# Altium PCB PCB_Project_1.PcbDoc
Units mm, origin at the board's own origin, x right, y up, seen from the top; angles counter-clockwise.
Board outline 35.1 x 25.1 mm, 2 copper layers (TOP, BOT), stack 0.375 mm thick; 46 components, 39 nets, 159 pads, 27 vias.
Unrouted connection lines stored in the file: 320.
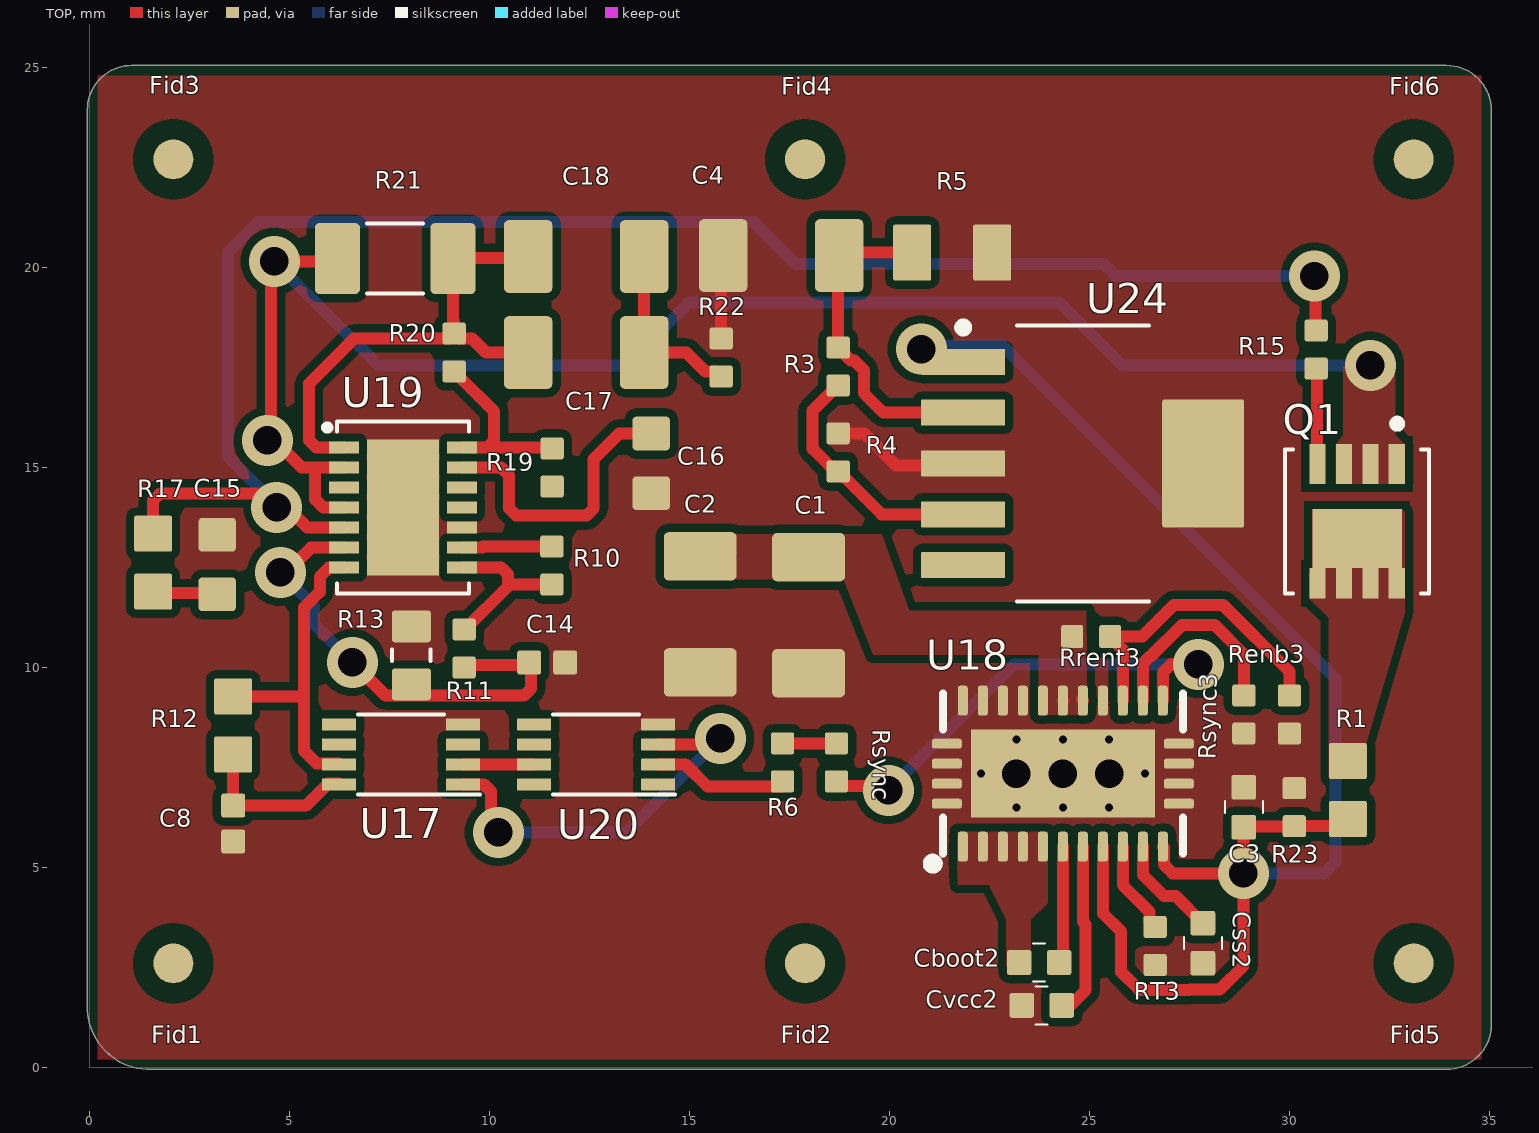
[diagram p0: TOP view]
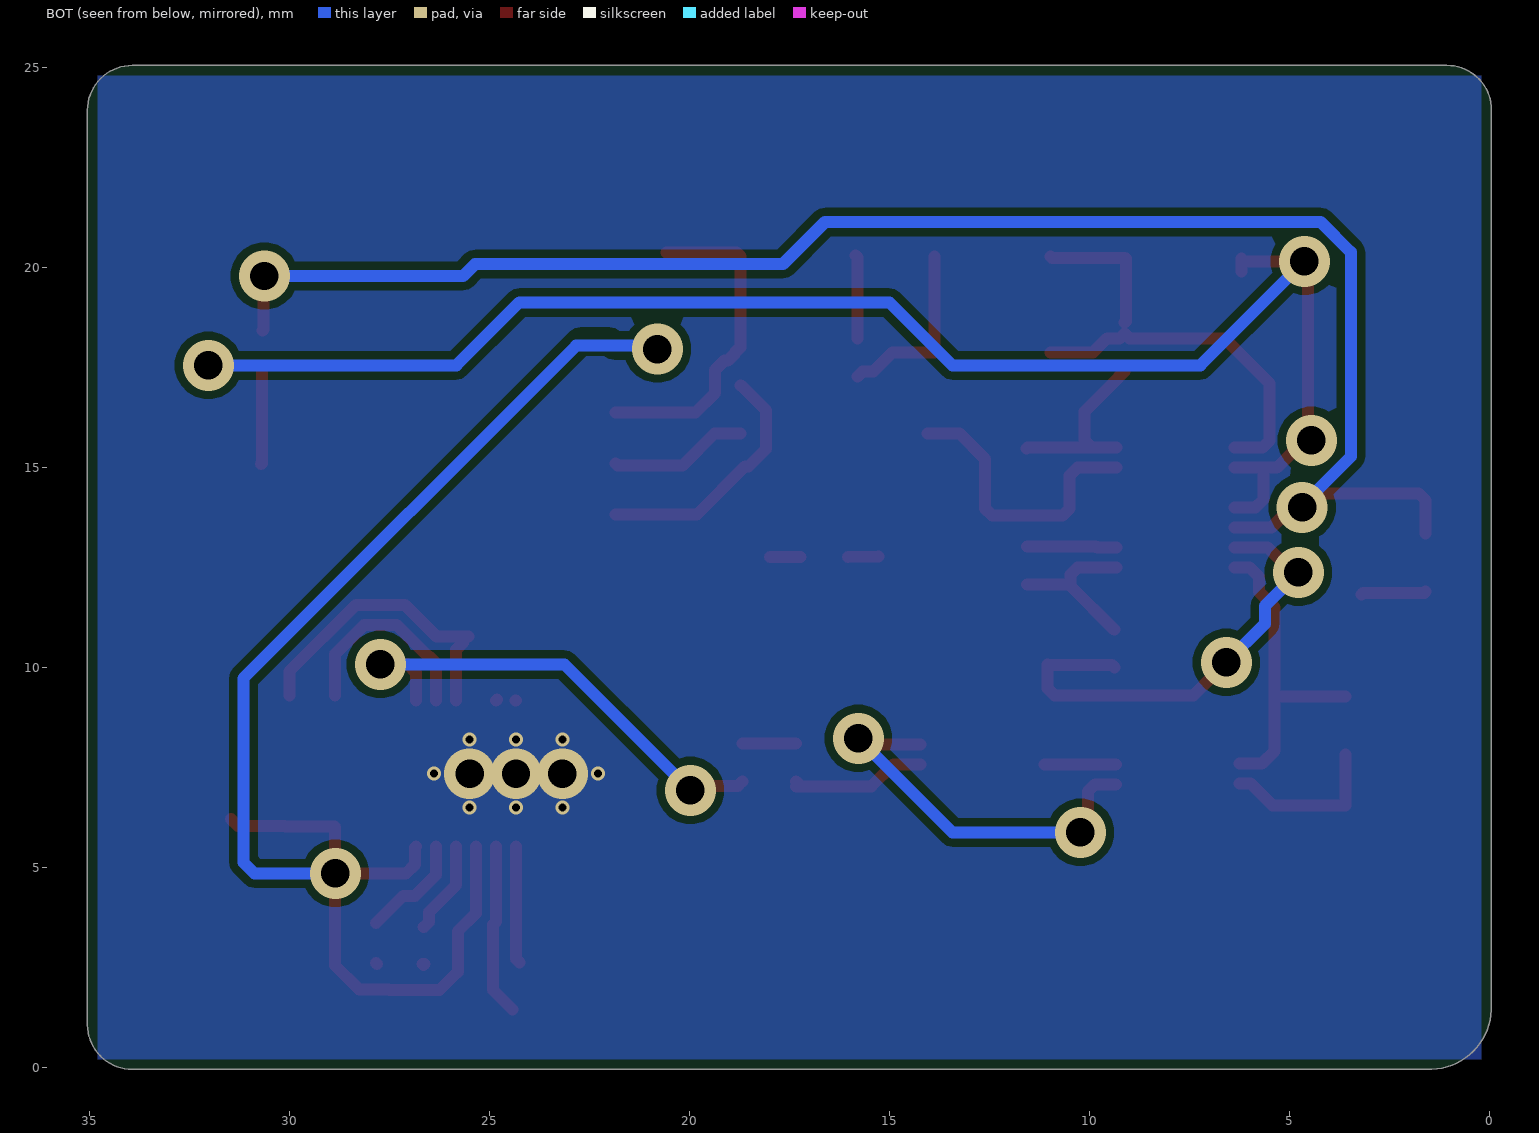
[diagram p1: BOT view, seen from below]
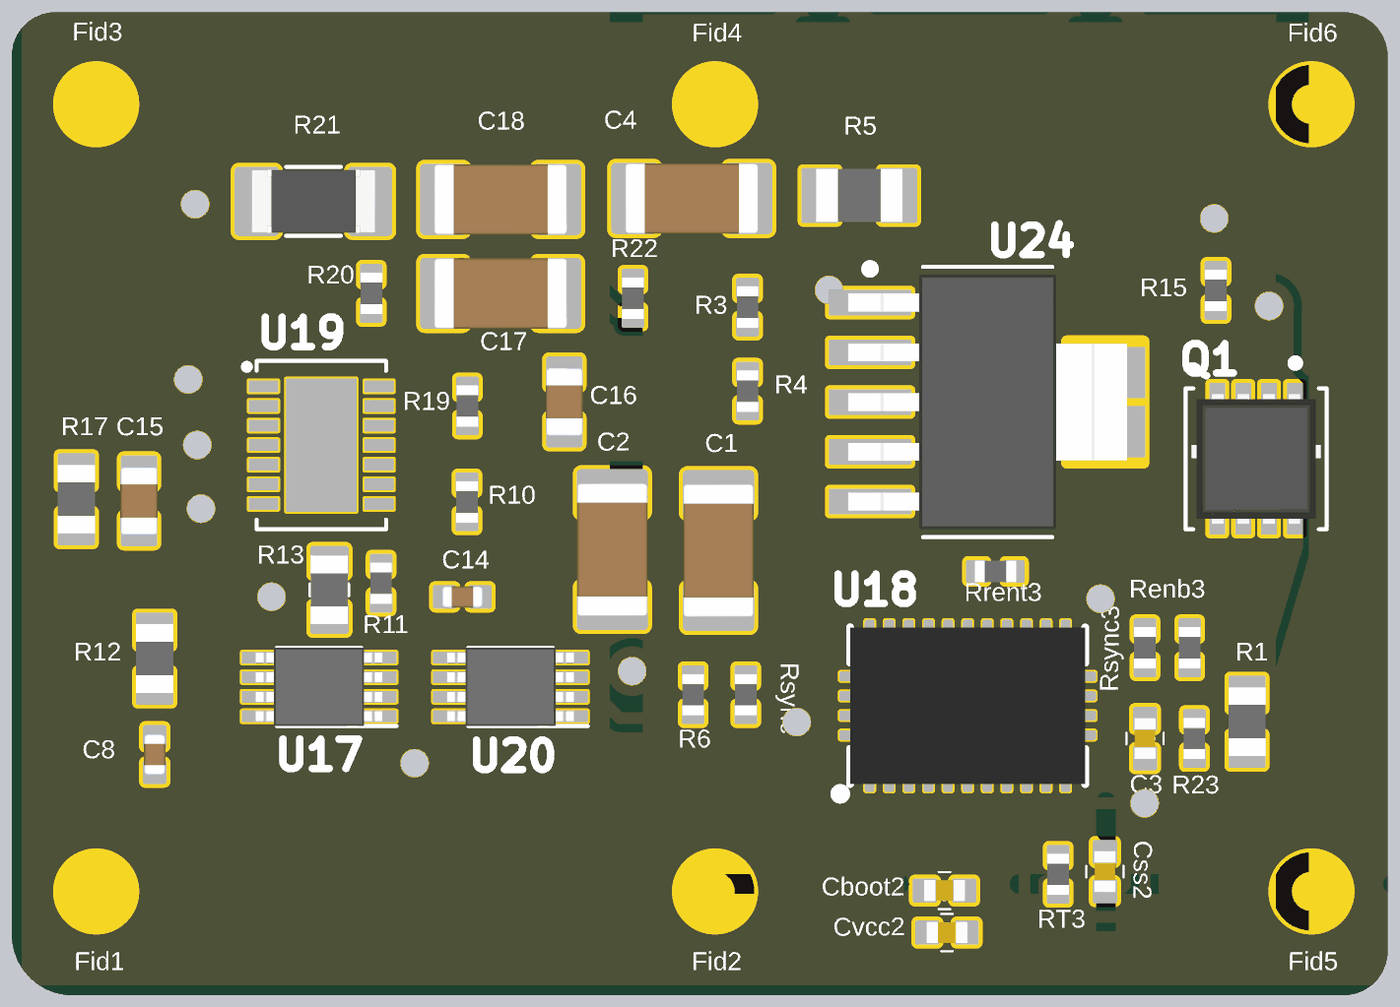
[diagram p2: 3D render of the assembled board from above, using the file's embedded part models]

## Layer stack, top to bottom
Top Solder: solder mask 0.01, Solder Resist, Dk 3.5
TOP: signal copper 0.035
Dielectric 1: core 0.3048, RO4003C, Dk 3.55
BOT: signal copper 0.035
Bottom Solder: solder mask 0.01, Solder Resist, Dk 3.5

## Board outline
-0.05,1.449 -0.05,23.939 cw(c1.061,23.939) 1.061,25.05 33.925,25.05 cw(c33.925,23.925) 35.05,23.928 35.05,23.927 35.05,1.075 35.05,1.069 cw(c33.925,1.075) 33.925,-0.05 1.449,-0.05 1.438,-0.049 cw(c1.5,1.5)

## Design rules (kind name [scope] priority, off if disabled: settings)
BoardOutlineClearance BoardOutlineClearance_TopSolder [IsPoly and OnTopSolderMask] p1: gap=0 ignorepadtopadclearanceinfootprint=FALSE
BoardOutlineClearance BoardOutlineClearance_botSolder [IsPoly and OnBottomSolderMask] p2: gap=0 ignorepadtopadclearanceinfootprint=FALSE
BoardOutlineClearance [All] p3: gap=0.2 ignorepadtopadclearanceinfootprint=FALSE
Clearance CTRL_UNIT_Clearance [WithinRoom('CTRL_UNIT_FANOUT')] p1: gap=0.1 ignorepadtopadclearanceinfootprint=FALSE
Clearance [All] p2: gap=0.2 ignorepadtopadclearanceinfootprint=TRUE
DiffPairsRouting [All] p1: maxlimit=0.3 minlimit=0.3 mostfreqgap=0.3 toplayer_minwidth=0.3 toplayer_maxwidth=0.3 toplayer_prefwidth=0.3 bottomlayer_minwidth=0.3 bottomlayer_maxwidth=0.3 bottomlayer_prefwidth=0.3 maxuncoupledlength=12.7
FabricationTestPointUsage TestPointUsage [All] p1: valid=0 allowmultiple=FALSE
FabricationTestpoint Testpoint [All] p1: side=3 testpointundercomponent=TRUE minsize=1.016 maxsize=2.54 preferedsize=1.524 minholesize=0 maxholesize=1.016 preferedholesize=0.813 testpointgrid=0.025 allowsidetop=TRUE allowsidebottom=TRUE usegrid=TRUE gridtolerance=0
HoleSize [All] p1: absolutevalues=TRUE maxlimit=5 minlimit=0.025 maxpercent=80.000 minpercent=20.000
HoleToHoleClearance [All] p1: gap=0.25 allowstackedmicrovias=TRUE
MinimumSolderMaskSliver [All] p1: minsoldermaskwidth=0.099
PlaneClearance [All] p1: clearance=0.2
PlaneConnect [All] p1: planeconnectstyle=Direct reliefexpansion=0.508 reliefentries=4 reliefconductorwidth=0.254 reliefairgap=0.254
PolygonConnect [All] p1: connectstyle=Direct reliefconductorwidth=0.254 reliefentries=4 polygonreliefangle="90 Angle" airgapwidth=0.254
RoutingCorners [All] p1: cornerstyle=45-Degree minsetback=1 maxsetback=1
RoutingVias [All] p1: holewidth=0.711 width=1.27 viastyle="Through Hole" minholewidth=0.711 minwidth=1.27 maxholewidth=0.711 maxwidth=1.27 useviatemplates=TRUE viatemplateguid#1={72B07870-E6F0-41A1-9A7A-AF21D1EB57B0} viatemplateguid#2={D1B59875-0DF5-4F30-926D-87D92F6A5A35} viatemplateguid#3={124C3F2C-4E11-4AFE-9AE5-E8E4755D781B} viatemplatename#1=v500h200T viatemplatename#2=v600h300T viatemplatename#3=v50h20m0mx0(Tol10-0)
SilkToSilkClearance [All] p1: silktosilkclearance=0.2
SilkToSolderMaskClearance SilkscreenOverComponentPads [IsPad] p1: minsilkscreentomaskgap=0.05 clearancetoexposedcopper=TRUE
SolderMaskExpansion [All] p1: expansion=0.102 istentingtop=FALSE
SupplyNets "Schematic Supply Nets" [InNet('GND')] p1: voltage=0.000
Width [All] p1: maxlimit=2 minlimit=0.2 preferedwidth=0.3
19 further rules are at their usual default settings.

## Classes and differential pairs
component class SE12: C3 C4 R2 R3 R4 R5 U24
component class SE10: C6 C8 C14 C15 C16 C17 C18 Q1 R6 R7 R8 R9 R10 R11 R12 R13 R14 R15 R16 R17 R18 R19 R20 R21 R22 R24 R142 U17 U19 U20
component class SE05: C1 C2 Cboot2 Css2 Cvcc2 L1 R23 Renb3 Rrent3 Rsync Rsync3 RT3 U18
component class "[01] - PCU_MODULE": R1
component class "[00] - INTERFACES_BOARD": Fid1 Fid2 Fid3 Fid4 Fid6

## Components (designator, comment, footprint, x,y, rotation, side; value= is the part's Value field where it differs from the comment)
C1 "22uF" CAPC320X160X180L55N 17.979,11.306 r90 top
C2 "22uF" CAPC320X160X180L55N 15.27,11.327 r90 top
C3 "" CAPC100X55X55L35N 28.86,6.504 r270 top
C4 "10uF" CAPC320X160X180L55N 17.295,20.297 r0 top
C8 "100nF" CAPC100X50X55L25N 3.595,6.097 r90 top
C14 "100nF" CAPC100X50X55L25N 11.445,10.122 r180 top
C15 "22nF" CAPC160X80X90L35N 3.195,12.572 r90 top
C16 "82nF" CAPC160X80X90L35N 14.045,15.102 r90 top
C17 "10uF" CAPC320X160X180L55N 12.42,17.872 r180 top
C18 "10uF" CAPC320X160X180L55N 12.42,20.272 r180 top
Cboot2 "4.7nF" CAPC100X55X55L35N 23.745,2.622 r180 top
Css2 "22nF" CAPC100X55X55L35N 27.837,3.106 r270 top
Cvcc2 "2.2uF" CAPC100X55X55L35N 23.808,1.55 r180 top
Fid1 "Fiducial_V2" Fiducial 2.1,2.6 r90 top
Fid2 "Fiducial_V2" Fiducial 17.891,2.6 r90 top
Fid3 "Fiducial_V2" Fiducial 2.1,22.702 r90 top
Fid4 "Fiducial_V2" Fiducial 17.891,22.702 r90 top
Fid5 "Fiducial_V2" Fiducial 33.107,2.6 r90 top
Fid6 "Fiducial_V2" Fiducial 33.107,22.702 r90 top
Q1 "SI7414DN-T1-GE3" "Vishay PowerPAK 1212-8 package" 31.695,13.647 r270 top
R1 "NoBom" RESC1608X50N 31.462,6.936 r90 top
R3 "12.7 k" RESC100X50X40L25N 18.72,17.522 r270 top
R4 "4.02 k" RESC100X50X40L25N 18.72,15.375 r270 top
R5 "NoBom" RESC2012X60N 21.57,20.372 r180 top
R6 "4.02 k" RESC100X50X40L25N 17.331,7.625 r90 top
R10 "54.9 k" RESC100X50X40L25N 11.561,12.547 r270 top
R11 "39K" RESC100X50X40L25N 9.37,10.472 r270 top
R12 "NoBom" RESC1608X50N 3.595,8.547 r270 top
R13 "NoBom" "RESC155X85X55L30N - NO BOM" 8.05,10.3 r270 top
R15 "10" RESC100X50X40L25N 30.67,17.947 r270 top
R17 "NoBom" RESC1608X50N 1.595,12.617 r270 top
R19 "4.99 k" RESC100X50X40L25N 11.57,14.997 r90 top
R20 "21K" RESC100X50X40L25N 9.12,17.872 r90 top
R21 "0R043" RESC315X160X65L50N 7.645,20.222 r0 top
R22 "0R1" RESC100X50X40L25N 15.795,17.747 r270 top
R23 "20K" RESC100X50X40L25N 30.12,6.504 r270 top
Renb3 "0" RESC100X50X40L25N 30,8.822 r90 top
Rrent3 "100K" RESC100X50X40L25N 25.045,10.772 r180 top
Rsync "100K" RESC100X50X40L25N 18.675,7.625 r270 top
Rsync3 "0" RESC100X50X40L25N 28.86,8.822 r90 top
RT3 "78.7 k" RESC100X50X40L25N 26.645,3.037 r270 top
U17 "SN74LVC2G08QDCURQ1" SOP50P310X90-8N 7.79,7.822 r90 top
U18 "TPS7H4010MRNPTSEP" TPS7H4010MRNPTSEP 24.335,7.342 r90 top
U19 "LTC4364HDE-2#PBF" DFN15P50_300X400X80L40X30T175X335 7.845,13.997 r0 top
U20 "SN74LVC2G08QDCURQ1" SOP50P310X90-8N 12.67,7.822 r90 top
U24 "TPS73801MDCQPSEP" SOT127P706X180-6N 24.845,15.097 r0 top

## Footprints (in the part's own frame and the unit in brackets; to place one, negate y for a bottom-side part, rotate by r counter-clockwise, add the part's x,y. Pads: shape width x height; smd on the part's side, far side on the other; paste and mask are expansions set on the pad)
CAPC100X50X55L25N [mm] "Capacitor, Chip;0402 (metric 1005); 1.00 mm L X 0.50 mm W X 0.55 mm H body"
  rrect20% 0.6x0.6 smd mask+0.1: 1(-0.45,0) 2(0.45,0)
  body extent -0.52,-0.27 0.53,0.28, height 0.55
CAPC100X55X55L35N [mm] "Capacitor, Chip;0402 (metric 1005); 1.05 mm L X 0.55 mm W X 0.55 mm H body"
  rrect20% 0.62x0.62 smd mask+0.1: 1(-0.5,0) 2(0.5,0)
  silkscreen extent -0.15,-0.48 0.15,0.48, body extent -0.53,-0.27 0.53,0.28, height 0.55
CAPC160X80X90L35N [mm] "Capacitor, Chip;0603 (metric 1608); 1.60 mm L X 0.80 mm W X 0.90 mm H body"
  rrect20% 0.84x0.93 smd: 1(-0.745,0) 2(0.745,0)
  body extent -0.87,-0.47 0.88,0.48, height 0.85
CAPC320X160X180L55N [mm] "Capacitor, Chip; 1206 (metric 3216);  3.20 mm L X 1.60 mm W X 1.80 mm H body"
  rrect20% 1.21x1.82 smd: 1(-1.45,0) 2(1.45,0)
  body extent -1.7,-0.9 1.7,0.9, height 1.8
DFN15P50_300X400X80L40X30T175X335 [mm] "DFN, 14 Leads, Pitch=0.50mm, Body=3.00x4.00mm, Height=0.80mm, Thermal Pad=1.75x3.35mm"
  rrect1% 0.75x0.3 smd mask+0.05: 1(-1.475,1.5) 2(-1.475,1) 3(-1.475,0.5) 4(-1.475,0) 5(-1.475,-0.5) 6(-1.475,-1) 7(-1.475,-1.5) 8(1.475,-1.5) 9(1.475,-1) 10(1.475,-0.5) 11(1.475,0) 12(1.475,0.5) 13(1.475,1) 14(1.475,1.5)
  rrect1% 1.8x3.4 smd mask+0.05: 15(0,0)
  silkscreen extent -1.92,-2.15 1.65,2.15, body extent -1.5,-2 1.5,2, height 0.75
Fiducial [mm] "Fiducial"
  round 1 smd paste-1 mask+0.6: 1(0,0)
  TOP pour cut-out: 0,-1 -0.383,-0.924 -0.707,-0.707 -0.924,-0.383 -1,0 -1,0 -0.924,0.383 -0.707,0.707 -0.383,0.924 0,1 0,1 0.383,0.924 0.707,0.707 0.924,0.383 1,0 1,0 0.924,-0.383 0.707,-0.707 0.383,-0.924 0,-1
RESC100X50X40L25N [mm] "Resistor, Chip; 0402 (metric 1005); 1.00 mm L X 0.50 mm W X 0.40 mm H body"
  rrect20% 0.55x0.58 smd: 1(-0.475,0) 2(0.475,0)
  body extent -0.52,-0.27 0.53,0.28, height 0.4
"RESC155X85X55L30N - NO BOM" [mm] "Resistor, Chip; 0603 (metric 1608);  1.55 mm L X 0.85 mm W X 0.55 mm H body"
  rrect20% 0.8x0.98 smd: 1(-0.725,0) 2(0.725,0)
  silkscreen extent -0.15,-0.48 0.15,0.48, body extent -0.87,-0.47 0.88,0.48, height 0.55
RESC315X160X65L50N [mm] "Resistor, Chip; 1206 (metric 3216); 3.15 mm L X 1.60 mm W X 0.65 mm H body"
  rrect20% 1.13x1.77 smd: 1(-1.445,0) 2(1.445,0)
  silkscreen extent -0.7,-0.88 0.7,0.88, body extent -1.58,-0.8 1.58,0.8, height 0.65
RESC1608X50N [mm] "Chip Resistor, EIA 0603, Body=1.60x0.80mm, Height=0.50mm, IPC Medium Density"
  rrect10% 0.9x0.95 smd mask+0.1: 1(-0.725,0) 2(0.725,0)
  body extent -0.87,-0.47 0.88,0.48, height 0.5
RESC2012X60N [mm] "Chip Resistor, EIA 0805, Body=2.00x1.25mm, Height=0.60mm, IPC Medium Density"
  rrect10% 0.95x1.4 smd mask+0.1: 1(-1,0) 2(1,0)
  body extent -1.1,-0.67 1.1,0.68, height 0.6
SOP50P310X90-8N [mm] "SOP,VSSOP8,SOT765-1, 0.50mm pitch; 8 pin, 2.30mm W X 2.00mm L X 0.90mm H body, PC Medium Density"
  rrect10% 0.3x0.85 smd mask+0.05: 1(-0.75,-1.55) 2(-0.25,-1.55) 3(0.25,-1.55) 4(0.75,-1.55) 5(0.75,1.55) 6(0.25,1.55) 7(-0.25,1.55) 8(-0.75,1.55)
  silkscreen extent -1,-1.97 1,1.07, body extent -1,-1.62 1,1.62, height 0.9
SOT127P706X180-6N [mm]
  rrect5% 2.1x0.65 smd: 1(-3,2.54) 2(-3,1.27) 3(-3,0) 4(-3,-1.27) 5(-3,-2.54)
  rrect5% 2.05x3.2 smd paste-2: 6(3,0)
  silkscreen extent -3.1,-3.45 1.65,3.5, body extent -3.55,-3.25 3.55,3.25, height 1.66
TPS7H4010MRNPTSEP [mm]
  rrect50% 0.75x0.25 smd mask-2539.97: 1(-1.825,2.5) 2(-1.825,2) 3(-1.825,1.5) 4(-1.825,1) 5(-1.825,0.5) 6(-1.825,0) 7(-1.825,-0.5) 8(-1.825,-1) 9(-1.825,-1.5) 10(-1.825,-2) 11(-1.825,-2.5) 16(1.825,-2.5) 17(1.825,-2) 18(1.825,-1.5) 19(1.825,-1) 20(1.825,-0.5) 21(1.825,0) 22(1.825,0.5) 23(1.825,1) 24(1.825,1.5) 25(1.825,2) 26(1.825,2.5)
  rrect50% 0.25x0.75 smd mask-2539.97: 12(-0.75,-2.9) 13(-0.25,-2.9) 14(0.25,-2.9) 15(0.75,-2.9) 27(0.75,2.9) 28(0.25,2.9) 29(-0.25,2.9) 30(-0.75,2.9)
  rect 2.2x4.6 smd paste-2539.97: 31(0,0)
  rrect50% 0.98x0.96 on Top Paste: ""(-0.58,1.74) ""(-0.58,-0.58) ""(-0.58,0.58) ""(-0.58,-1.74) ""(0.58,1.74) ""(0.58,-0.58) ""(0.58,0.58) ""(0.58,-1.74)
  silkscreen extent -2.37,-3 2,3.37, body extent -2,-3 2,3, height 0.8
"Vishay PowerPAK 1212-8 package" [mm]
  rect 0.99x0.405 smd: 1(-1.438,0.99) 2(-1.438,0.33) 3(-1.438,-0.33) 4(-1.438,-0.99)
  rect 0.76x0.405 smd: 5(1.547,-0.99) 6(1.547,-0.33) 7(1.547,0.33) 8(1.547,0.99)
  rect 1.475x2.235 smd: 9(0.43,0)
  silkscreen extent -2.54,-1.8 1.8,1.8, body extent -1.65,-1.65 1.65,1.65, height 1.06

## Part data
C1 C2: library part GRM31CC71E226ME15L, "CAP CER 22uF 25V ±20% X7S 1206", Case/Package=340Case, Dielectric=1542DielectricType, Manufacturer=Murata, Max Operating Temperature=125°C, Min Operating Temperature=-55°C, Supplier Part Number=490-GRM31CC71E226ME15LCT-ND, Tolerance=20%, Voltage Rating=25V, Capacitance=22uF, Category="Ceramic Capacitors", ComponentLink1Description=Datasheet, ComponentLink1URL=https://search.murata.co.jp/Ceramy/image/img/A01X/G101/ENG/GRM31CC71E226ME15-01A.pdf, Height=1.9mm, Length=3.2mm, Manufacturer Part Number=GRM31CC71E226ME15L, Material=4241ConductorMaterial, Pricing 1="1=0,92, 10=0,562, 50=0,4202, 100=0,3759, 500=0,30056, 1000=0,27702 (USD)", RoHS=No, Stock 1=3447, Supplier=Digikey, Thickness=1.6mm, Voltage Rating (DC)=25V, Width=1.6mm
C3 Css2: library part GRM155R71E223JA61, "Multilayer Ceramic Capacitor, 0.022 uF, 25 V, ± 5%, X7R, 0402 [1005 Metric]", Manufacturer=Murata, Manufacturer Part Number=GRM155R71E223JA61D, Supplier Part Number=3582812, Category="Ceramic Capacitors", ComponentLink1Description=https://datasheet.ciiva.com/5427/product-5427580.pdf?src-supplier=Mouser, ComponentLink1URL=https://datasheet.ciiva.com/5427/product-5427580.pdf?src-supplier=Mouser, ComponentLink2Description=https://datasheet.ciiva.com/29535/grm155r71e223ka61-01-29535418.pdf?src-supplier=Digikey, ComponentLink2URL=https://datasheet.ciiva.com/29535/grm155r71e223ka61-01-29535418.pdf?src-supplier=Digikey, Material=4241ConductorMaterial, Pricing="10=0,017, 100=0,013, 500=0,012, 2500=0,0118, 5000=0,0115 (EUR)", RoHS=Yes, Stock=11149, Supplier=Farnell
C4 C17 C18: library part C3216X7R1H106K160AC, "CAP CER 10UF 50V X7R 1206", Case Code (Imperial)=1206, Case Code (Metric)=3216, Dielectric=1511DielectricType, Manufacturer=TDK, Max Operating Temperature=125°C, Min Operating Temperature=-55°C, Supplier Part Number 1=71AH3370, Tolerance=10%, Voltage Rating=50V, Capacitance=10uF, Case/Package=1206, Category="Ceramic Capacitors", ComponentLink1Description=https://product.tdk.com/info/en/catalog/datasheets/mlcc_commercial_general_en.pdf?src-supplier=Digikey, ComponentLink1URL=https://product.tdk.com/info/en/catalog/datasheets/mlcc_commercial_general_en.pdf?src-supplier=Digikey, ComponentLink2Description=https://datasheet.octopart.com/C3216X7R1H106K160AC-TDK-datasheet-159617022.pdf?src-supplier=TME, ComponentLink2URL=https://datasheet.octopart.com/C3216X7R1H106K160AC-TDK-datasheet-159617022.pdf?src-supplier=TME, Height=1.9mm, Lead Free=5697LeadFree, Length=3.2mm, Manufacturer Part Number=C3216X7R1H106K160AC, Material=4241ConductorMaterial, Mount="Surface Mount", Packaging="Cut Tape", Pricing 1="1=0,797, 10=0,603, 25=0,57, 50=0,537, 100=0,505 (USD)", RoHS=Yes, RoHS Compliant=Yes, Series=C, Stock 1=19909, Supplier 1=Avnet, Thickness=1.6mm, Voltage Rating (DC)=50V, Width=1.6mm
C8 C14: library part C1005X7R1H104K050BB, "CAP CER 100nF 50V ±10% X7R 0402", Case Code (Imperial)=0402, Case Code (Metric)=1005, Dielectric=X7R, Dielectric Material=Ceramic, Manufacturer=TDK, Max Operating Temperature=125°C, Min Operating Temperature=-55°C, Package Quantity=1, Supplier Part Number 1=2427315, Tolerance=10%, Voltage=50V, Capacitance=100nF, Case/Package=0402, Category="Ceramic Capacitors", ComponentLink1Description=https://datasheet.ciiva.com/16427/c1005x7r1h104k050bb-16427685.pdf?src-supplier=Future+Electronics, ComponentLink1URL=https://datasheet.ciiva.com/16427/c1005x7r1h104k050bb-16427685.pdf?src-supplier=Future+Electronics, ComponentLink2Description=https://datasheet.ciiva.com/26285/2983c1005x7r1h104k050bb-26285417.pdf?src-supplier=Onlinecomponents.com, ComponentLink2URL=https://datasheet.ciiva.com/26285/2983c1005x7r1h104k050bb-26285417.pdf?src-supplier=Onlinecomponents.com, ComponentLink3Description=https://datasheet.ciiva.com/22725/1913358-22725480.pdf?src-supplier=Element14, ComponentLink3URL=https://datasheet.ciiva.com/22725/1913358-22725480.pdf?src-supplier=Element14, ComponentLink4Description=https://datasheet.ciiva.com/6292/tdkmlcccaprange-6292410.pdf?src-supplier=Digi-Key, ComponentLink4URL=https://datasheet.ciiva.com/6292/tdkmlcccaprange-6292410.pdf?src-supplier=Digi-Key, ComponentLink5Description=https://datasheet.ciiva.com/22725/1913358-22725482.pdf?src-supplier=Element14, ComponentLink5URL=https://datasheet.ciiva.com/22725/1913358-22725482.pdf?src-supplier=Element14, ComponentLink6Description=https://datasheet.ciiva.com/23802/1796654-23802749.pdf?src-supplier=Newark, ComponentLink6URL=https://datasheet.ciiva.com/23802/1796654-23802749.pdf?src-supplier=Newark, ComponentLink7Description=https://datasheet.ciiva.com/48671/e412-c-48671294.pdf?src-supplier=Avnet, ComponentLink7URL=https://datasheet.ciiva.com/48671/e412-c-48671294.pdf?src-supplier=Avnet, ComponentLink8Description=https://datasheet.ciiva.com/6292/tdkmlcccaprange-6292415.pdf?src-supplier=Digi-Key, ComponentLink8URL=https://datasheet.ciiva.com/6292/tdkmlcccaprange-6292415.pdf?src-supplier=Digi-Key, Construction=Flat, Depth=0.5mm, Height=0.5mm, Lead Free="Lead Free", Length=1mm, Manufacturer Part Number=C1005X7R1H104K050BB, Mount="Surface Mount", Packaging="Tape and Reel", Pricing 1="100=0,04100, 200=0,02500, 500=0,02100, 1000=0,01700 (EUR)", Radiation Hardening=No, Resistor Type=Ceramic, RoHS=Yes, RoHS Compliant=Yes, Series=C, Stock 1=9900, Supplier 1=Rs, Termination=SMD/SMT, Thickness=0.022inch, Voltage Rating=50V, Voltage Rating (DC)=50V, Weight=2.3E-05oz, Width=0.02inch
C15: library part 885012206091, "CAP CER 22nF 50V ±10% X7R 0603", Capacitor Type=Ceramic, Manufacturer 1="Wurth Electronics Inc.", Operating Temperature="-55°C ~ 125°C", Package / Case="0603 (1608 Metric)", Supplier Part Number 1=732-8009-1-ND, Temperature Coefficient=X7R, Tolerance=±10%, Voltage Rating=50V, Applications="General Purpose", Capacitance=22nF, Category=Capacitors, ComponentLink1Description="Online Datasheet", ComponentLink1URL=https://katalog.we-online.de/pbs/datasheet/885012206091.pdf, Description 1="CAP CER 22nF 50V ±10% X7R 0603", Features=-, Footprint Name=CAPC1608X85N, Manufacturer Part Number 1=885012206091, Mounting Type="Surface Mount", Packaging="Cut Tape (CT)", Part Status=Active, RoHS="RoHS Compliant", Supplier 1=Digi-Key
C16: library part KAM15AR71H823KT, "CAP CER 82nF 50V ±10% X7R 0603", Capacitor Type=Ceramic, Manufacturer="KYOCERA AVX", Operating Temperature="-55°C ~ 125°C", Package / Case="0603 (1608 Metric)", Supplier Part Number=478-KAM15AR71H823KTCT-ND, Temperature Coefficient=X7R, Tolerance=±10%, Voltage Rating=50V, Applications="General Purpose", Capacitance=82nF, Category=Capacitors, ComponentLink1Description=Datasheet, ComponentLink1URL=https://datasheets.kyocera-avx.com/AutoMLCCKAM.pdf, Features=-, Footprint Name=CAPC160X80X90L35N, Manufacturer Part Number=KAM15AR71H823KT, Mounting Type="Surface Mount", Packaging="Cut Tape (CT)", Part Status=Active, RoHS="RoHS Compliant", Supplier=Digi-Key
Cboot2: library part GRM155R71E472KA01, "0402 4.7 nF 25 V ±10% Tolerance X7R SMT Multilayer Ceramic Capacitor", Manufacturer=Murata, Manufacturer Part Number=GRM155R71E472KA01D, Supplier Part Number=4326802, Category="Ceramic Capacitors", ComponentLink1Description=https://datasheet.ciiva.com/18184/getdatasheetpartid-129543-18184709.pdf?src-supplier=Verical, ComponentLink1URL=https://datasheet.ciiva.com/18184/getdatasheetpartid-129543-18184709.pdf?src-supplier=Verical, ComponentLink2Description=https://datasheet.ciiva.com/130/product-130032.pdf?src-supplier=Digikey, ComponentLink2URL=https://datasheet.ciiva.com/130/product-130032.pdf?src-supplier=Digikey, ComponentLink3Description=https://datasheet.ciiva.com/16392/product-16392847.pdf?src-supplier=Future+Electronics, ComponentLink3URL=https://datasheet.ciiva.com/16392/product-16392847.pdf?src-supplier=Future+Electronics, ComponentLink4Description=https://datasheet.ciiva.com/2989/product-2989394.pdf?src-supplier=Avnet, ComponentLink4URL=https://datasheet.ciiva.com/2989/product-2989394.pdf?src-supplier=Avnet, ComponentLink5Description=https://datasheet.ciiva.com/2989/product-2989393.pdf?src-supplier=Avnet, ComponentLink5URL=https://datasheet.ciiva.com/2989/product-2989393.pdf?src-supplier=Avnet, ComponentLink6Description=https://datasheet.ciiva.com/130/partnumbering-e-01-130033.pdf?src-supplier=Digikey, ComponentLink6URL=https://datasheet.ciiva.com/130/partnumbering-e-01-130033.pdf?src-supplier=Digikey, ComponentLink7Description=https://datasheet.ciiva.com/130/partnumbering-e-01-130034.pdf?src-supplier=Digikey, ComponentLink7URL=https://datasheet.ciiva.com/130/partnumbering-e-01-130034.pdf?src-supplier=Digikey, Lead Free=5697LeadFree, Material=4241ConductorMaterial, Pins=2NUMBER, Pricing="10=0,015, 100=0,01, 500=0,007, 2500=0,006, 5000=0,0059 (EUR)", RoHS=Yes, Stock=39799, Supplier=Farnell
Cvcc2: library part GRM155D71C225ME11, "Multilayer Ceramic Capacitor, 2.2 uF, 16 V, ± 20%, X7T, 0402 [1005 Metric]", Case/Package=343Case, Dielectric=1545DielectricType, Manufacturer=Murata, Manufacturer Part Number=GRM155D71C225ME11D, Max Operating Temperature=125°C, Min Operating Temperature=-55°C, Supplier Part Number=81-GRM155D71C225ME11, Tolerance=20%, Voltage Rating=16V, Category="Ceramic Capacitors", ComponentLink1Description=https://datasheet.octopart.com/GRM155D71C225ME11D-Murata-datasheet-165579666.pdf?src-supplier=TME, ComponentLink1URL=https://datasheet.octopart.com/GRM155D71C225ME11D-Murata-datasheet-165579666.pdf?src-supplier=TME, Height=650um, Length=1mm, Material=4241ConductorMaterial, Pricing="1=0,17, 10=0,113, 50=0,113, 100=0,073, 1000=0,067, 10000=0,057 (USD)", RoHS=Yes, RoHS Compliant=Yes, Stock=102807, Supplier=Mouser, Thickness=500um, Voltage Rating (DC)=16V, Width=500um
Fid1 Fid2 Fid3 Fid4 Fid5 Fid6: "Fiducial No Pin", Category=Miscellaneous
Q1: "MOSFET N-CH 60V 5.6A PPAK1212-8", Manufacturer="Vishay Siliconix", Supplier Part Number=SI7414DN-T1-GE3CT-ND, Category=MOSFETs, ComponentLink1Description=Datasheet, ComponentLink1URL=https://www.vishay.com/docs/71738/71738.pdf, Manufacturer Part Number=SI7414DN-T1-GE3, Pricing 1="1=2,27, 10=1,455, 100=0,9898, 500=0,79058, 1000=0,72652 (USD)", RoHS=Yes, Stock 1=6579, Supplier=Digikey
R1 R12 R17: library part 1RES_NO_BOM, "Resistore Non in BOM", Category=Resistors
R3: library part CRCW040212K7FKED, "RES 12K7 OHM 1/16W 1% 0402", Manufacturer="Vishay Dale", Operating Temperature="-55 °C ~ 155 °C", Package / Case="0402 (1005 metrico)", Power (Watts)="0,063 W, 1/16 W", Resistance=12K7, Supplier Part Number 1=541-12.7KLCT-ND, Temperature Coefficient="±100 ppm/ °C", Tolerance=±1%, Category=Resistors, ComponentLink1Description=Datasheet, ComponentLink1URL=http://www.vishay.com/docs/20035/dcrcwe3.pdf, Composition="Thick Film", Features="AEC Q100 automotive", Footprint Name=RESC1005X40N, Manufacturer 1="Vishay Dale", Manufacturer Part Number=CRCW040212K7FKED, Manufacturer Part Number 1=CRCW040212K7FKED, Packaging="Cut Tape (CT)", Part Status=Active, Supplier 1=Digi-Key
R4 R6: library part CRCW04024K02FKED, "RES 4K02 OHM 1/16W 1% 0402", Manufacturer="Vishay Dale", Operating Temperature="-55 °C ~ 155 °C", Package / Case="0402 (1005 metrico)", Power (Watts)="0,063 W, 1/16 W", Resistance=4K02, Supplier Part Number 1=541-4.02KLCT-ND, Temperature Coefficient="±100 ppm/ °C", Tolerance=±1%, Category=Resistors, ComponentLink1Description=Datasheet, ComponentLink1URL=http://www.vishay.com/docs/20035/dcrcwe3.pdf, Composition="Thick Film", Features="AEC Q100 automotive", Footprint Name=RESC1005X40N, Manufacturer 1="Vishay Dale", Manufacturer Part Number=CRCW04024K02FKED, Manufacturer Part Number 1=CRCW04024K02FKED, Packaging="Cut Tape (CT)", Part Status=Active, Supplier 1=DigiKey
R5: library part 1RES_NO_BOM_0805, "Resistore Non in BOM", Category=Resistors
R10: library part CRCW040254K9FKED, "RES 54K9 OHM 1/16W 1% 0402", Manufacturer="Vishay Dale", Operating Temperature="-55 °C ~ 155 °C", Package / Case="0402 (1005 metrico)", Power (Watts)="0,063 W, 1/16 W", Resistance=54K9, Supplier Part Number 1=541-54.9KLCT-ND, Temperature Coefficient="±100 ppm/ °C", Tolerance=±1%, Category=Resistors, ComponentLink1Description=Datasheet, ComponentLink1URL=http://www.vishay.com/docs/20035/dcrcwe3.pdf, Composition="Thick Film", Features="AEC Q100 automotive", Footprint Name=RESC1005X40N, Manufacturer 1="Vishay Dale", Manufacturer Part Number=CRCW040254K9FKED, Manufacturer Part Number 1=CRCW040254K9FKED, Packaging="Cut Tape (CT)", Part Status=Active, Supplier 1=DigiKey
R11: library part CRCW040239K0FKED, "RES 39K OHM 1/16W 1% 0402", Manufacturer="Vishay Dale", Operating Temperature="-55 °C ~ 155 °C", Package / Case="0402 (1005 metrico)", Power (Watts)="0,063 W, 1/16 W", Supplier Part Number 1=541-39.0KLCT-ND, Temperature Coefficient="±100 ppm/ °C", Tolerance=±1%, Category=Resistors, ComponentLink1Description=Datasheet, ComponentLink1URL=http://www.vishay.com/docs/20035/dcrcwe3.pdf, Composition="Thick Film", Features="AEC Q100 automotive", Footprint Name=RESC1005X40N, Manufacturer 1="Vishay Dale", Manufacturer Part Number=CRCW040239K0FKED, Manufacturer Part Number 1=CRCW040239K0FKED, Packaging="Cut Tape (CT)", Part Status=Active, Resistance=39K, Supplier 1=DigiKey
R13: library part 1RES_NO_BOM_0603, "Resistore Non in BOM", Category=Resistors
R15: library part CRCW040210R0FKED, "RES 10 OHM 1/16W 1% 0402", Manufacturer="Vishay Dale", Operating Temperature="-55 °C ~ 155 °C", Package / Case="0402 (1005 metrico)", Power (Watts)="0,063 W, 1/16 W", Supplier Part Number 1=541-10.0LCT-ND, Temperature Coefficient="±100 ppm/ °C", Tolerance=±1%, Category=Resistors, ComponentLink1Description=Datasheet, ComponentLink1URL=http://www.vishay.com/docs/20035/dcrcwe3.pdf, Composition="Thick Film", Features="AEC Q100 automotive", Footprint Name=RESC1005X40N, Manufacturer 1="Vishay Dale", Manufacturer Part Number=CRCW040210R0FKED, Manufacturer Part Number 1=CRCW040210R0FKED, Packaging="Cut Tape (CT)", Part Status=Active, Resistance=10, Supplier 1=Digi-Key
R19: library part CRCW04024K99FKED, "RES 4K99 OHM 1/16W 1% 0402", Manufacturer="Vishay Dale", Operating Temperature="-55 °C ~ 155 °C", Package / Case="0402 (1005 metrico)", Power (Watts)="0,063 W, 1/16 W", Resistance=4K99, Supplier Part Number 1=541-4.99KLCT-ND, Temperature Coefficient="±100 ppm/ °C", Tolerance=±1%, Category=Resistors, ComponentLink1Description=Datasheet, ComponentLink1URL=http://www.vishay.com/docs/20035/dcrcwe3.pdf, Composition="Thick Film", Features="AEC Q100 automotive", Footprint Name=RESC1005X40N, Manufacturer 1="Vishay Dale", Manufacturer Part Number=CRCW04024K99FKED, Manufacturer Part Number 1=CRCW04024K99FKED, Packaging="Cut Tape (CT)", Part Status=Active, Supplier 1=DigiKey
R20: library part CRCW040221K0FKED, "RES 21K OHM 1/16W 1% 0402", Manufacturer="Vishay Dale", Operating Temperature="-55 °C ~ 155 °C", Package / Case="0402 (1005 metrico)", Power (Watts)="0,063 W, 1/16 W", Supplier Part Number 1=541-21.0KLCT-ND, Temperature Coefficient="±100 ppm/ °C", Tolerance=±1%, Category=Resistors, ComponentLink1Description=Datasheet, ComponentLink1URL=http://www.vishay.com/docs/20035/dcrcwe3.pdf, Composition="Thick Film", Features="AEC Q100 automotive", Footprint Name=RESC1005X40N, Manufacturer 1="Vishay Dale", Manufacturer Part Number=CRCW040221K0FKED, Manufacturer Part Number 1=CRCW040221K0FKED, Packaging="Cut Tape (CT)", Part Status=Active, Resistance=21K, Supplier 1=Digi-Key
R21: library part WSTM1206QLR043FNR, "RES 0R043 OHM 1W 1% 1206", Manufacturer=Littelfuse, Supplier Part Number=18-WSTM1206QLR043FNRCT-ND, Category="Chip SMD Resistors", ComponentLink1Description=Datasheet, ComponentLink1URL=https://mm.digikey.com/Volume0/opasdata/d220001/medias/docus/4897/WSTM_Series_3-17-23.pdf, Manufacturer Part Number=WSTM1206QLR043FNR, Pricing 1="1=0,61, 10=0,41, 25=0,34, 50=0,2876, 100=0,2153, 250=0,19176, 500=0,1569, 1000=0,12203, 5000=0,10788 (USD)", Resistance=0R043, RoHS=No, Stock 1=4775, Supplier=Digikey
R22: library part RUT1005FR100CS, "RES 0R1 OHM 1/10W 1% 0402", Manufacturer="Samsung Electro-Mechanics America, Inc.", Operating Temperature="-55°C ~ 155°C", Package / Case="0402 (1005 Metric)", Power (Watts)="0.1W, 1/10W", Supplier Part Number 1=1276-6167-1-ND, Temperature Coefficient=±150ppm/°C, Tolerance=±1%, Category=Resistors, ComponentLink1Description=http://www.samsungsem.com/kr/support/library/product-catalog/__icsFiles/afieldfile/2015/09/22/CHIP_RESISTOR_2015.pdf, ComponentLink1URL=http://www.samsungsem.com/kr/support/library/product-catalog/__icsFiles/afieldfile/2015/09/22/CHIP_RESISTOR_2015.pdf, Composition="Thick Film", Features="Current Sense, Moisture Resistant", Footprint Name=RESC1005X40N, Manufacturer 1="Samsung Electro-Mechanics America, Inc.", Manufacturer Part Number=RUT1005FR100CS, Manufacturer Part Number 1=RUT1005FR100CS, Packaging="Cut Tape (CT)", Part Status=Active, Resistance=0R1, Supplier 1=Digi-Key
R23: library part CRCW040220K0FKED, "RES 20K OHM 1/16W 1% 0402", Manufacturer="Vishay Dale", Operating Temperature="-55 °C ~ 155 °C", Package / Case="0402 (1005 metrico)", Power (Watts)="0,063 W, 1/16 W", Supplier Part Number 1=541-20.0KLCT-ND, Temperature Coefficient="±100 ppm/ °C", Tolerance=±1%, Category=Resistors, ComponentLink1Description=Datasheet, ComponentLink1URL=http://www.vishay.com/docs/20035/dcrcwe3.pdf, Composition="Thick Film", Features="AEC Q100 automotive", Footprint Name=RESC1005X40N, Manufacturer 1="Vishay Dale", Manufacturer Part Number=CRCW040220K0FKED, Manufacturer Part Number 1=CRCW040220K0FKED, Packaging="Cut Tape (CT)", Part Status=Active, Resistance=20K, Supplier 1=Digi-Key
Renb3 Rsync3: library part CRCW0402100KFKED, "RES  100K OHM 1/16W 1% 0402", Manufacturer="Vishay Dale", Operating Temperature="-55 °C ~ 155 °C", Package / Case="0402 (1005 metrico)", Power (Watts)="0,063 W, 1/16 W", Resistance=100K, Supplier Part Number 1=541-100KLCT-ND, Temperature Coefficient="±100 ppm/ °C", Tolerance=±1%, Category=Resistors, ComponentLink1Description=Datasheet, ComponentLink1URL=http://www.vishay.com/docs/20035/dcrcwe3.pdf, Composition="Thick Film", Features="AEC Q100 automotive", Footprint Name=RESC1005X40N, Manufacturer 1="Vishay Dale", Manufacturer Part Number=CRCW0402100KFKED, Manufacturer Part Number 1=CRCW0402100KFKED, Packaging="Cut Tape (CT)", Part Status=Active, Supplier 1=Digi-Key
Rrent3: library part CRCW0402100KFKED, "RES 100K OHM 1/16W 1% 0402", Manufacturer="Vishay Dale", Operating Temperature="-55 °C ~ 155 °C", Package / Case="0402 (1005 metrico)", Power (Watts)="0,063 W, 1/16 W", Supplier Part Number 1=541-100KLCT-ND, Temperature Coefficient="±100 ppm/ °C", Tolerance=±1%, Category=Resistors, ComponentLink1Description=Datasheet, ComponentLink1URL=http://www.vishay.com/docs/20035/dcrcwe3.pdf, Composition="Thick Film", Features="AEC Q100 automotive", Footprint Name=RESC1005X40N, Manufacturer 1="Vishay Dale", Manufacturer Part Number=CRCW0402100KFKED, Manufacturer Part Number 1=CRCW0402100KFKED, Packaging="Cut Tape (CT)", Part Status=Active, Resistance=100K, Supplier 1=Digi-Key
Rsync: library part CRCW0402100KFKED, "RES  100K OHM 1/16W 1% 0402", Manufacturer="Vishay Dale", Operating Temperature="-55 °C ~ 155 °C", Package / Case="0402 (1005 metrico)", Power (Watts)="0,063 W, 1/16 W", Supplier Part Number 1=541-100KLCT-ND, Temperature Coefficient="±100 ppm/ °C", Tolerance=±1%, Category=Resistors, ComponentLink1Description=Datasheet, ComponentLink1URL=http://www.vishay.com/docs/20035/dcrcwe3.pdf, Composition="Thick Film", Features="AEC Q100 automotive", Footprint Name=RESC1005X40N, Manufacturer 1="Vishay Dale", Manufacturer Part Number=CRCW0402100KFKED, Manufacturer Part Number 1=CRCW0402100KFKED, Packaging="Cut Tape (CT)", Part Status=Active, Resistance=100K, Supplier 1=Digi-Key
RT3: library part CRCW040278K7FKED, "RES 78K7 OHM 1/16W 1% 0402", Manufacturer="Vishay Dale", Operating Temperature="-55 °C ~ 155 °C", Package / Case="0402 (1005 metrico)", Power (Watts)="0,063 W, 1/16 W", Resistance=78K7, Supplier Part Number 1=541-78.7KLCT-ND, Temperature Coefficient="±100 ppm/ °C", Tolerance=±1%, Category=Resistors, ComponentLink1Description=Datasheet, ComponentLink1URL=http://www.vishay.com/docs/20035/dcrcwe3.pdf, Composition="Thick Film", Features="AEC Q100 automotive", Footprint Name=RESC1005X40N, Manufacturer 1="Vishay Dale", Manufacturer Part Number=CRCW040278K7FKED, Manufacturer Part Number 1=CRCW040278K7FKED, Packaging="Cut Tape (CT)", Part Status=Active, Supplier 1=DigiKey
U17 U20: "Automotive 2-ch, 2-input, 1.65-V to 5.5-V AND gates 8-VSSOP -40 to 125", Manufacturer="Texas Instruments", Supplier Part Number=296-SN74LVC2G08QDCURQ1CT-ND, Category="Logic Gates", ComponentLink1Description=Datasheet, ComponentLink1URL=https://www.ti.com/lit/ds/symlink/sn74lvc2g08-q1.pdf, Manufacturer Part Number=SN74LVC2G08QDCURQ1, Pricing 1="1=0,47, 10=0,33, 25=0,2944, 100=0,2555, 250=0,237, 500=0,22578, 1000=0,21657 (USD)", RoHS=No, Stock 1=5504, Supplier=Digikey
U18: "Buck Switching Regulator IC Positive Adjustable 1V 1 Output 6A 30-WFQFN Exposed Pad", Manufacturer="Texas Instruments", Supplier Part Number=296-TPS7H4010MRNPTSEP-ND, Category="Integrated Circuits (ICs)", ComponentLink1Description=Datasheet, ComponentLink1URL=https://www.ti.com/lit/ds/symlink/tps7h4010-sep.pdf?ts=1730267059055&ref_url=https%253A%252F%252Fwww.mouser.ca%252F, Manufacturer Part Number=TPS7H4010MRNPTSEP, RoHS=Yes, Supplier=Digikey
U19: "Hot Swap Controller 1-CH 80V N-Channel Positive High Voltage Automotive 14-Pin DFN EP Tube", Manufacturer="Analog Devices / Linear Technology", Supplier Part Number=505-LTC4364HDE-2#PBF-ND, Category="Hot Swap Controllers", ComponentLink2Description=Datasheet, ComponentLink2URL=https://www.analog.com/media/en/technical-documentation/data-sheets/ltc4364-1-4364-2.pdf, Manufacturer Part Number=LTC4364HDE-2#PBF, Pricing 1="1=14,27, 10=10,149, 25=9,0872, 100=7,9018, 250=7,3278, 500=6,9784, 1000=6,8125 (USD)", RoHS=Yes, Stock 1=6155, Supplier=Digikey
U24: "LDO Voltage Regulators Radiation-tolerant, 2.2-V to 20-V input, 1-A adjustable LDO regulator in a plastic package 6-SOT-223 -55 to 125", Current - Output=1A, Manufacturer="Texas Instruments", Operating Temperature="-55°C ~ 125°C", Package / Case="SOT-223 (6)", Supplier Part Number=595-TPS73801MDCQPSEP, Voltage - Input="1.4V ~ -20 V", Voltage - Output="1.21V ~ -20 V", Category=Regulators, ComponentLink1Description=Datasheet, ComponentLink1URL=https://www.ti.com/lit/ds/symlink/tps73801-sep.pdf?ts=1731944378746&ref_url=https%253A%252F%252Fwww.ti.com%252Fproduct%252FTPS73801-SEP, Manufacturer Part Number=TPS73801MDCQPSEP, Mounting Type="Surface Mount", Number of Regulators=1, Packaging="Cut Tape (CT)", Part Status=Active, Regulator Type="Positive Adjustable", RoHS="RoHS Compliant", Supplier=Mouser

## Via types
v1: diameter 1.27/1.27 (per signal layer), hole 0.711, TOP to BOT, tented both sides, 16 vias
v2: diameter 0.35, hole 0.2, TOP to BOT, tented both sides, 11 vias

## Nets (pads, with @x,y where several pads share a name; then routed paths per layer and width w, separated by ;. In a path a pad name is that pad's centre, name@x,y a point inside that pad or via, vN(x,y) a via of type N, cw(c..) or ccw(c..) an arc to the next point about the centre after c; other vN are vias at no path point)
3V3_AUX: 
5V7_RF_MOD_OCP_FAULT: R6.1 U20.2 | length 3.5
  TOP w0.3: U20.2 14.903,7.572 15.45,7.025 R6.1@17.331,7.025 ; R6.1@17.231,7.05 R6.1
6V5_DIG1_OCP_FAULT: U20.5
+3V3_AUX: R6.2 Rsync.1 | length 1.3
  TOP w0.3: R6.2 Rsync.1
+5V7_OCXO_OCP_FAULT: U19.11
+5V_AUX: C4.2 R3.1 R5.2 U24.2 | length 8.3
  TOP w0.3: R5.2 18.82,20.372 C4.2 18.72,20.272 R3.1 18.735,17.997 18.86,17.872 18.86,17.848 19.036,17.672 19.123,17.672 19.36,17.435 19.36,16.857 19.85,16.367 U24.2
+5V_DIG2_OCP_FAULT: U20.6
GND: C1.1 C2.1 C3.1 C4.1 C8.1 C14.1 C15.2 C16.1 Css2.2 Cvcc2.2 R4.1 R5.1 R13.1 R19.1 R22.1 R23.1 Renb3.1 Rsync3.1 RT3.2 U17.4 U18.12 U18.13 U18.14 U18.15 U18.19 U18.23 U18.24 U18.25 U18.26 U18.27 U18.28 U18.29 U18.30 U18.31 U19.10 U19.15 U20.4 U24.3 U24.6 | length 5.7
  TOP w0.3: R22.1 15.795,20.247 C4.1 ; R4.1 19.367,15.85 20.17,15.047 21.795,15.047 U24.3 ; RT3.2@26.623,2.584 RT3.2 RT3.2@26.667,2.584 ; Css2.2@27.815,2.584 Css2.2
  other v1: 23.175,7.342 24.335,7.342 25.495,7.342
  other v2: 23.175,6.492 24.335,6.492 25.495,6.492 22.285,7.342 23.175,7.342 24.335,7.342 25.495,7.342 26.385,7.342 23.175,8.192 24.335,8.192 25.495,8.192
NetC3_2: C3.2 R1.1 R23.2 U18.8 U18.11 U24.1 | length 36.4
  TOP w0.3: U18.8 25.335,3.853 25.789,3.4 25.789,2.39 26.242,1.937 27.501,1.937 27.511,1.946 28.255,1.946 28.855,2.546 28.855,5.995 C3.2@28.862,6.002 ; U18.11 26.86,5.492 26.86,5.073 27.083,4.85 v1(28.85,4.85) ; C3.2 28.872,6.017 30.108,6.017 R23.2 31.28,6.029 R1.1
  BOT w0.3: v1(20.8,17.957) 20.887,18.044 22.831,18.044 31.15,9.725 31.15,5.125 30.875,4.85 v1(28.85,4.85)
NetC6_2: U20.8
NetC8_2: C8.2 R12.2 U17.8 | length 4.2
  TOP w0.3: R12.2 C8.2 5.42,6.547 5.97,7.097 U17.8@6.245,7.097
NetC14_2: C14.2 R11.2 R13.2 U19.6 | length 12
  TOP w0.3: v1(4.775,12.375) 4.923,12.375 5.545,12.997 U19.6 ; v1(6.575,10.125) 7.403,9.297 10.869,9.297 11.045,9.473 11.045,10.072 11.032,10.06 9.432,10.06 R11.2
  BOT w0.3: v1(4.775,12.375) 5.609,11.541 5.609,11.091 v1(6.575,10.125)
NetC15_1: C15.1 R17.2 | length 1.6
  TOP w0.3: R17.2 1.627,11.86 3.162,11.86 C15.1
NetC16_2: C16.2 U19.13 | length 7.3
  TOP w0.3: U19.13 10.294,14.997 10.495,14.796 10.495,13.973 10.671,13.797 12.433,13.797 12.608,13.973 12.608,15.212 13.244,15.847 C16.2
NetC17_1: C17.1 C18.1 R22.2 | length 4.6
  TOP w0.3: C18.1 C17.1 14.925,17.872 15.4,17.397 15.67,17.397 R22.2
NetCboot2_1: Cboot2.1 U18.6 | length 2.9
  TOP w0.3: Cboot2.1 24.335,2.712 U18.6
NetCboot2_2: Cboot2.2 U18.1 U18.2 U18.3 U18.4 U18.5
NetCss2_1: Css2.1 U18.10 | length 2.7
  TOP w0.3: U18.10 26.335,4.816 26.86,4.291 27.152,4.291 Css2.1
NetCvcc2_1: Cvcc2.1 U18.7 | length 4.3
  TOP w0.3: Cvcc2.1@24.417,1.442 24.905,1.93 24.905,3.576 24.835,3.646 U18.7
NetQ1_1: Q1.1 Q1.2 Q1.3 R21.1 U19.2 U19.4 | length 40.1
  TOP w0.3: R21.1@6.2,19.902 R21.1 6.128,20.15 v1(4.625,20.15) 4.538,20.062 4.538,15.762 v1(4.45,15.675) 4.629,15.675 5.307,14.997 5.671,14.997 ; U19.4 5.851,13.997 5.645,14.203 5.645,14.971 5.671,14.997 ; U19.2 5.671,14.997
  BOT w0.3: v1(4.625,20.15) 7.225,17.55 13.425,17.55 15,19.125 24.25,19.125 25.825,17.55 v1(32.025,17.55)
NetQ1_4: Q1.4 R15.2 | length 2.4
  TOP w0.3: R15.2 30.688,17.455 30.688,15.103 Q1.4
NetQ1_5: Q1.5 Q1.6 Q1.7 Q1.8 Q1.9 R1.2
NetR2_1: U24.5
NetR3_2: R3.2 R4.2 U24.4 | length 6.3
  TOP w0.3: R3.2 18.705,17.047 18.08,16.422 18.08,15.462 18.517,15.025 18.61,15.025 19.808,13.827 U24.4
NetR8_2: R10.1 U19.9 | length 2.3
  TOP w0.3: U19.9 9.814,12.997 9.839,13.022 R10.1
NetR10_2: R10.2 R11.1 U19.8 | length 4.2
  TOP w0.3: U19.8 10.294,12.497 10.47,12.321 10.47,12.032 ; R11.1 9.385,10.947 10.47,12.032 ; R10.2 10.51,12.072 10.47,12.032
NetR15_1: R15.1 R17.1 U19.5 | length 42.3
  TOP w0.3: R17.1 1.595,14.174 1.771,14.35 4.213,14.35 4.563,14 v1(4.681,14) ; v1@4.681,14.025 4.919,14.025 5.446,13.497 U19.5 ; v1(30.625,19.785) 30.647,19.763 30.647,18.445 R15.1
  BOT w0.3: v1(4.681,14) 4.681,14.051 3.465,15.267 3.465,20.383 4.217,21.135 16.61,21.135 17.66,20.085 25.358,20.085 25.658,19.785 v1(30.625,19.785)
NetR18_1: U19.12
NetR19_2: R19.2 R20.1 U19.14 | length 4.7
  TOP w0.3: R20.1 9.135,17.397 9.26,17.272 9.26,17.257 10.12,16.397 10.12,15.673 9.944,15.497 ; U19.14 9.944,15.497 ; R19.2 11.545,15.497 9.944,15.497
NetR142_2: U20.1
NetRenb3_2: Renb3.2 Rrent3.1 U18.18 | length 7.6
  TOP w0.3: Rrent3.1 26.322,10.772 27.11,11.56 28.34,11.56 30,9.9 Renb3.2 ; Rrent3.1@25.645,10.632 25.835,10.442 U18.18
NetRsync3_2: Rsync3.2 U18.17 | length 5.2
  TOP w0.3: U18.17 26.335,10.096 26.511,10.272 26.529,10.272 27.317,11.06 28.133,11.06 28.86,10.333 Rsync3.2
NetRsync_2: Rsync.2 U18.16 | length 11.4
  TOP w0.3: Rsync.2 18.788,7.037 19.863,7.037 v1(19.975,6.925) ; U18.16 26.835,9.871 27.045,10.08
  BOT w0.3: v1(19.975,6.925) 23.125,10.075 v1(27.725,10.075)
NetRT3_1: RT3.1 U18.9 | length 2.3
  TOP w0.3: U18.9 25.835,4.555 26.505,3.885 26.505,3.637 26.63,3.512 RT3.1
NetU17_1: U17.1 U20.3 | length 10
  TOP w0.3: U17.1 9.864,7.072 10.039,6.896 10.039,6.061 v1(10.225,5.875) ; U20.3 15.622,8.072 v1(15.775,8.225)
  BOT w0.3: v1(10.225,5.875) 13.425,5.875 v1(15.775,8.225)
NetU17_2: U17.2 U20.7 | length 1.8
  TOP w0.3: U17.2 U20.7
OCXO_+5V7: C17.2 C18.2 R20.2 R21.2 U19.1 | length 12.1
  TOP w0.3: U19.1 5.671,15.497 5.495,15.673 5.495,17.097 6.62,18.222 8.995,18.222 R20.2 9.245,18.222 9.565,18.222 9.915,17.872 C17.2 ; 9.12,18.622 9.09,18.652 R21.2 9.106,20.239 10.936,20.239 C18.2
OUT_DCDC_+12V: C1.2 C2.2 Rrent3.2 U18.20 U18.21 U18.22 | length 1.6
  TOP w0.3: C2.2 C2.2@16.03,12.762 ; C1.2@17.219,12.762 C1.2 ; U18.21 U18.21@24.345,9.177 ; U18.20@24.81,9.192 U18.20
S\H\D\N\_\L\T\C\4\3\6\3\_\5\V\7\_\O\C\X\O\: R12.1 U17.7 U19.7 | length 8
  TOP w0.3: R12.1 5.356,9.272 5.37,9.287 ; U17.7@6.245,7.597 6.105,7.597 5.684,7.597 5.37,7.911 5.37,9.287 ; U19.7 5.995,12.497 5.76,12.262 5.76,11.887 5.37,11.497 5.37,9.287
pads on no net: Fid1.1 Fid2.1 Fid3.1 Fid4.1 Fid5.1 Fid6.1 U17.3 U17.5 U17.6 U18. U19.3

## Polygon pours and split planes (outlines as drawn)
GND on TOP "GND_L01_P144" (solid, pour order 144): 0,25 35,25 35,0 0,0
GND on TOP "GND_TOP" (solid, shelved, pour order 122): 0,0 125,0 125,150 0,150
NetQ1_1 on TOP "NETQ1_1_L01_P143" (solid, pour order 143): 31.163,15.58 31.163,14.59 32.888,14.59 32.888,15.58 32.65,15.818 32.65,17.55 31.4,17.55 31.35,17.5 31.35,15.8
NetCboot2_2 on TOP "NETCBOOT2_2_L01_P128" (solid, pour order 128): 21.712,5.892 23.958,5.892 23.958,5.535 23.958,5.223 23.958,4.11 23.539,3.69 23.539,2.888 23.539,2.392 22.919,2.383 22.919,3.69 22.479,4.565 22.029,4.565 21.712,4.565 21.694,5.223 21.694,5.535
OUT_DCDC_+12V on TOP "OUT_DCDC_+12V_L01_P130" (solid, pour order 130): 14.395,13.347 14.395,12.208 18.854,12.187 19.595,10.316 21.864,10.316 23.729,10.316 23.729,9.524 23.729,8.81 24.942,8.81 24.92,11.422 20.495,11.422 19.808,13.326 18.854,13.326
NetQ1_5 on TOP "NETQ1_5_L01_P134" (solid, pour order 134): 30.987,7.256 31.937,7.256 31.924,8.098 32.888,11.372 32.888,13.88 32.813,13.955 30.578,13.955 30.578,12.48 30.577,12.48 30.503,12.48 30.503,11.72 30.987,11.236 30.987,9.077
GND on M2 Board Dimensions "NONET_L-01_P-001" (solid): 0,25 35,25 35,0 0,0
no net on M2 Board Dimensions "NONET_L-01_P-001" (solid): 0,25 35,25 35,0 0,0 0,2.912
GND on BOT "GND_L02_P145" (solid, pour order 145): 0,25 35,25 35,0 0,0

## Silkscreen, mask and mechanical layers (free items; w line width, h text height)
M1 Board Outline:
  lines w0.1: 0,1.449 0,23.939 cw(c1.061,23.939) 1.061,25 33.925,25 cw(c33.925,23.925) 35,23.927 35,1.075 cw(c33.925,1.075) 33.925,0 ; 0.001,1.448 ccw(c1.5,1.5) 1.5,0 ; 1.449,0 33.925,0
M9 Title Sheet:
  drawing of 46 lines, arcs and shapes, not listed
  text "1" at -61.729,193.316 h1.78
  text "2" at 2.915,193.316 h1.78
  text "3" at 68.067,193.316 h1.78
  text "4" at 132.965,193.316 h1.78
  text "5" at 197.99,193.316 h1.78
  text "6" at 263.015,193.316 h1.78
  text "A" at -92.07,170.304 h1.78
  text "A" at 288.93,170.304 h1.78
  text "B" at -92.07,122.247 h1.78
  text "B" at 288.93,122.247 h1.78
  text "C" at -92.07,73.733 h1.78
  text "C" at 288.93,73.733 h1.78
  text "D" at -92.07,25.727 h1.78
  text "D" at 288.93,25.727 h1.78
  text "E" at -92.07,-22.787 h1.78
  text "E" at 288.93,-22.787 h1.78
  text "F" at -92.07,-71.047 h1.78
  text "F" at 288.93,-71.047 h1.78
  text "Advanced Technology Applications" at 233.525,-72.025 h1.5
  text ".PRJ_Title" at 256.6,-77.075 h1.5
  text "PROJECT TITLE:" at 234.775,-77.275 h1.5
  text "DESIGNED FOR:" at 234.775,-82.275 h1.5
  text ".PRJ_Customer" at 254.409,-82.275 h1.5
  text "Size" at 233.525,-86.275 h1.5
  text ".print_Scale" at 242.975,-86.275 h1.5
  text ".Print_Date" at 260.275,-86.275 h1.5
  text "REV." at 277.575,-86.275 h1.5
  text "A4" at 233.525,-90.275 h2
  text "ENGINEER:" at 242.975,-90.275 h1.5
  text ".PRJ_Engineer" at 258.025,-90.275 h1.5
  text ".PCB_Rev" at 277.575,-90.275 h1.5
  text "1" at -61.729,-93.704 h1.78
  text "2" at 2.915,-93.704 h1.78
  text "3" at 68.067,-93.704 h1.78
  text "4" at 132.965,-93.704 h1.78
  text "5" at 197.99,-93.704 h1.78
  text "6" at 263.015,-93.704 h1.78